# Altium PCB Header.pcbdoc
Units mm, origin at the board's own origin, x right, y up, seen from the top; angles counter-clockwise.
Board outline 41.39 x 37.67 mm, 2 copper layers (Top Layer, Bottom Layer); 1 components, 2 nets, 6 pads, 0 vias.
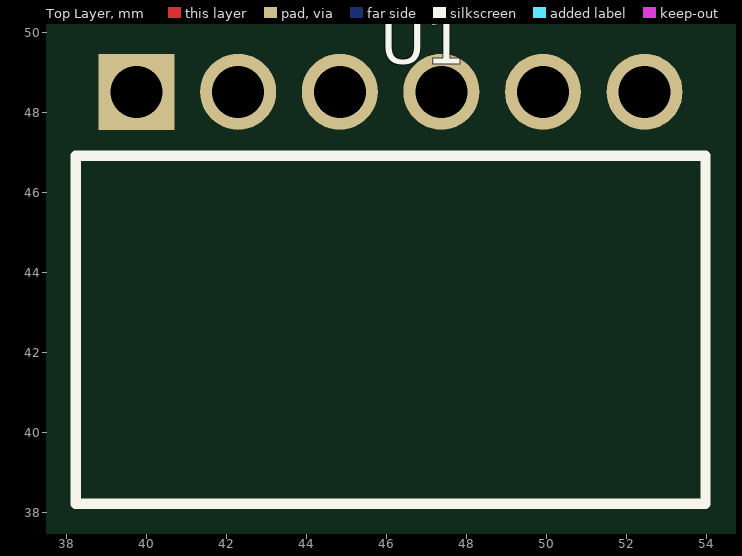
[diagram p0: Top Layer view]
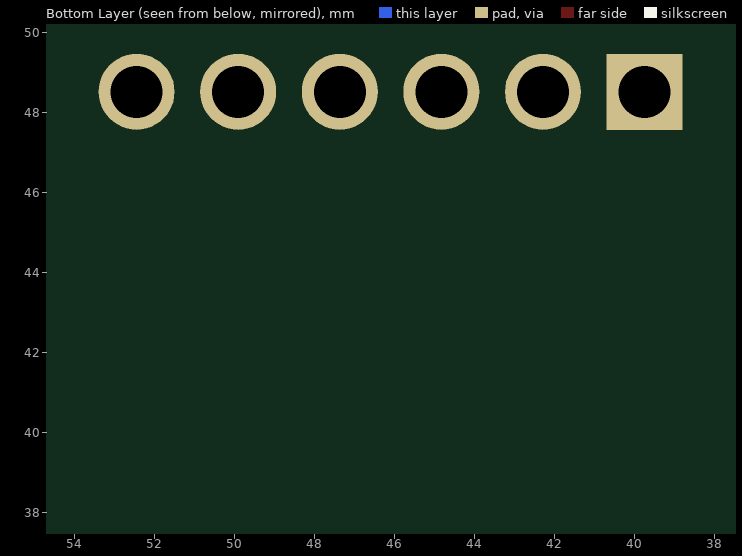
[diagram p1: Bottom Layer view, seen from below]

## Layer stack, top to bottom
Top Layer: signal copper (thickness not stored)
Dielectric: dielectric 0.32, FR-4, Dk 4.8
Bottom Layer: signal copper (thickness not stored)

## Board outline
66.794,25.4 25.4,25.4 25.4,63.068 66.794,63.068

## Components (designator, comment, footprint, x,y, rotation, side; value= is the part's Value field where it differs from the comment)
U1 "HDR-TH_6P-P2.54-H-W8.6_A2541HWR-6P" HDR-TH_6P-P2.54-H-W8.6_A2541HWR-6P 46.097,48.527 r0 top

## Footprints (in the part's own frame and the unit in brackets; to place one, negate y for a bottom-side part, rotate by r counter-clockwise, add the part's x,y. Pads: shape width x height; smd on the part's side, far side on the other; paste and mask are expansions set on the pad)
HDR-TH_6P-P2.54-H-W8.6_A2541HWR-6P [mm]
  rect 1.9x1.9 hole 1.3: 1(-6.35,0)
  round 1.9 hole 1.3: 2(-3.81,0) 3(-1.27,0) 4(1.27,0) 5(3.81,0) 6(6.35,0)
  silkscreen extent -7.87,-10.3 7.87,-1.6

## Nets (pads, with @x,y where several pads share a name; then routed paths per layer and width w, separated by ;. In a path a pad name is that pad's centre, name@x,y a point inside that pad or via, vN(x,y) a via of type N, cw(c..) or ccw(c..) an arc to the next point about the centre after c; other vN are vias at no path point)
S$51: 
S$53: 
pads on no net: U1.1 U1.2 U1.3 U1.4 U1.5 U1.6

## Silkscreen, mask and mechanical layers (free items; w line width, h text height)
Document:
  lines w0.003: 46.072,44.209 46.122,44.26